# Altium PCB GeneratedSystem.PcbDoc
Units mm, origin at the board's own origin, x right, y up, seen from the top; angles counter-clockwise.
Board outline 63.14 x 52.55 mm, 2 copper layers (Top, Bottom), stack 0 mm thick; 73 components, 51 nets, 276 pads, 0 vias.
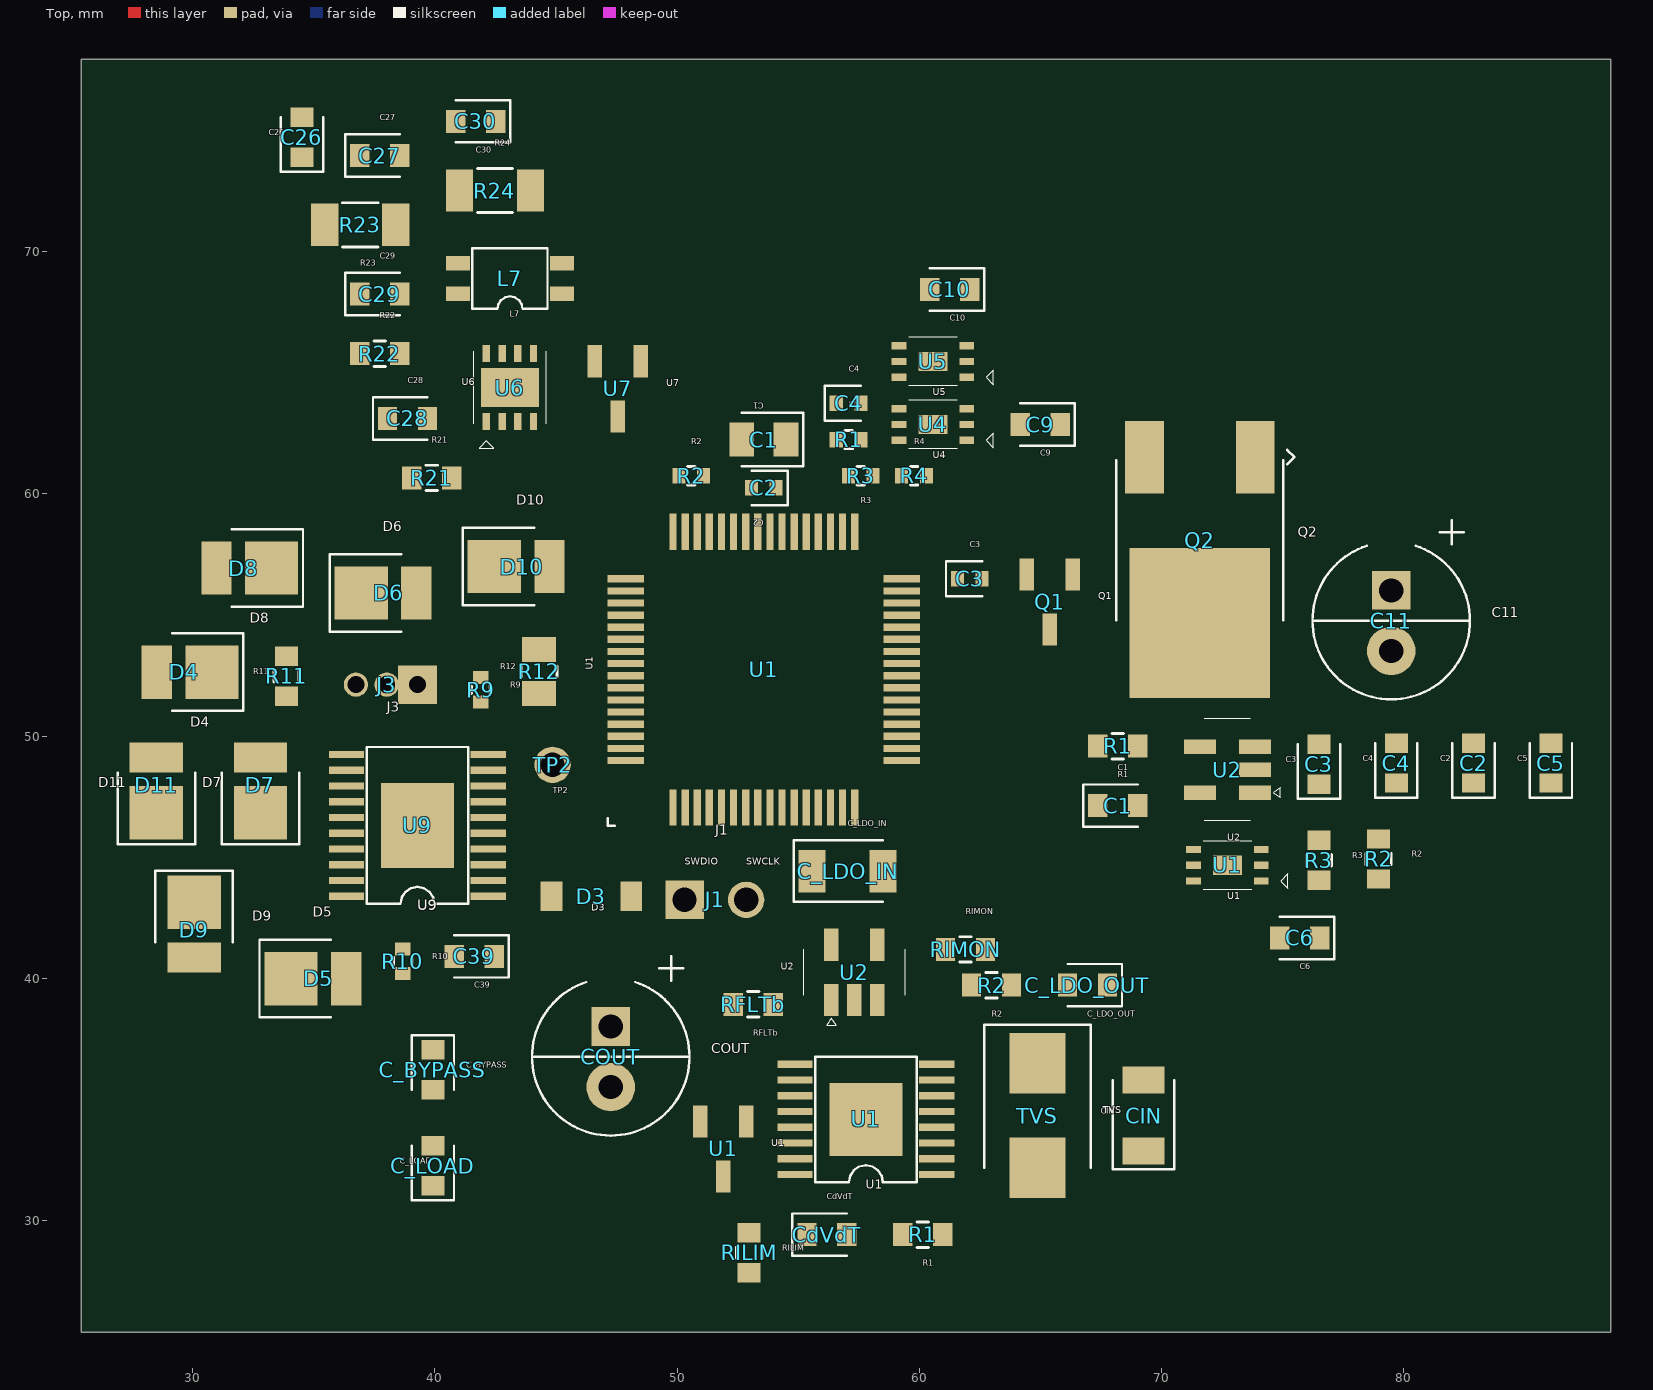
[diagram p0: Top view]
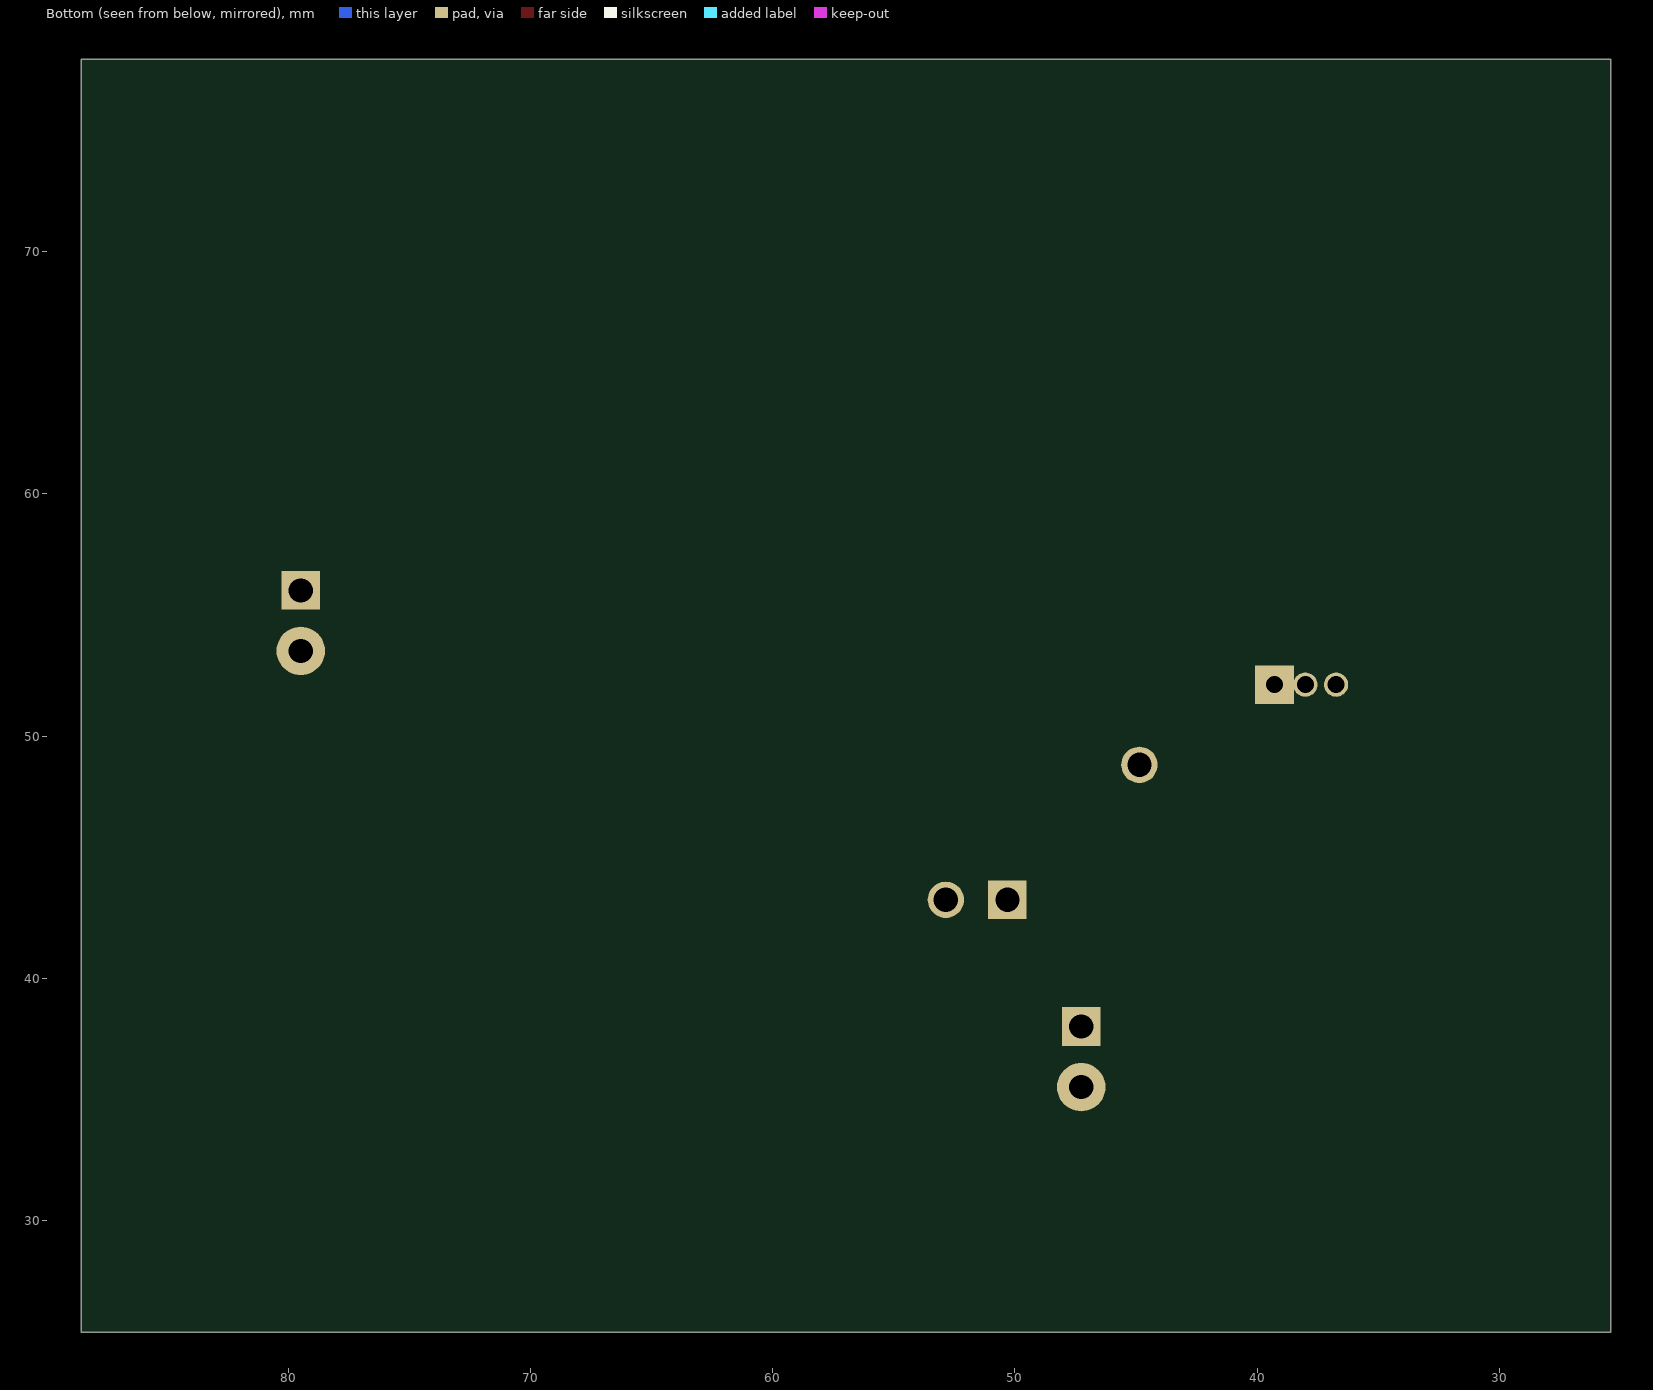
[diagram p1: Bottom view, seen from below]

## Layer stack, top to bottom

## Board outline
25.4,25.4 88.543,25.4 88.543,77.947 25.4,77.947

## Components (designator, comment, footprint, x,y, rotation, side; value= is the part's Value field where it differs from the comment)
C1 "" TSCIRCUIT-2.8500x1.4000mm 53.58,62.248 r180 top
C1 "" TSCIRCUIT-2.4500x0.9500mm 68.188,47.13 r0 top
C2 "" TSCIRCUIT-1.5600x0.6400mm 53.58,60.247 r180 top
C2 "" TSCIRCUIT-0.9500x2.4500mm 82.878,48.891 r90 top
C3 "" TSCIRCUIT-1.5600x0.6400mm 62.08,56.497 r0 top
C3 "" TSCIRCUIT-0.9500x2.4500mm 76.498,48.84 r90 top
C4 "" TSCIRCUIT-1.5600x0.6400mm 57.08,63.748 r0 top
C4 "" TSCIRCUIT-0.9500x2.4500mm 79.688,48.891 r90 top
C5 "" TSCIRCUIT-0.9500x2.4500mm 86.068,48.891 r90 top
C6 "" TSCIRCUIT-2.4500x0.9500mm 75.698,41.67 r180 top
C9 "" TSCIRCUIT-2.4500x0.9500mm 64.99,62.867 r180 top
C10 "" TSCIRCUIT-2.4500x0.9500mm 61.26,68.448 r180 top
C11 "" TSCIRCUIT-2x4.5000mm 79.481,54.771 r270 top
C26 "" TSCIRCUIT-0.9500x2.4500mm 34.51,74.722 r90 top
C27 "" TSCIRCUIT-2.4500x0.9500mm 37.72,73.972 r0 top
C28 "" TSCIRCUIT-2.4500x0.9500mm 38.87,63.123 r0 top
C29 "" TSCIRCUIT-2.4500x0.9500mm 37.72,68.253 r0 top
C30 "" TSCIRCUIT-2.4500x0.9500mm 41.68,75.387 r180 top
C39 "" TSCIRCUIT-2.4500x0.9500mm 41.63,40.912 r180 top
C_BYPASS "" TSCIRCUIT-0.9500x2.4500mm 39.915,36.233 r270 top
C_LDO_IN "" TSCIRCUIT-4.0500x1.7500mm 57.035,44.432 r0 top
C_LDO_OUT "" TSCIRCUIT-2.4500x0.9500mm 66.94,39.72 r180 top
C_LOAD "" TSCIRCUIT-0.9500x2.4500mm 39.915,32.273 r90 top
CdVdT "" TSCIRCUIT-2.4500x0.9500mm 56.185,29.422 r0 top
CIN "" TSCIRCUIT-1.7500x4.0500mm 69.255,34.34 r90 top
COUT "" TSCIRCUIT-2x4.5000mm 47.26,36.763 r270 top
D3 "" TSCIRCUIT-4.2000x1.2000mm 46.46,43.392 r180 top
D4 "" TSCIRCUIT-4x2.2000mm 29.895,52.643 r180 top
D5 "" TSCIRCUIT-4x2.2000mm 34.96,39.993 r0 top
D6 "" TSCIRCUIT-4x2.2000mm 37.855,55.912 r0 top
D7 "" TSCIRCUIT-2.2000x4mm 32.8,47.743 r90 top
D8 "" TSCIRCUIT-4x2.2000mm 32.355,56.942 r180 top
D9 "" TSCIRCUIT-2.2000x4mm 30.06,42.243 r270 top
D10 "" TSCIRCUIT-4x2.2000mm 43.355,57.002 r0 top
D11 "" TSCIRCUIT-2.2000x4mm 28.5,47.743 r90 top
J1 "" TSCIRCUIT-4.0400x1.5000mm 51.58,43.248 r0 top
J3 "" TSCIRCUIT-3.5400x1mm 38.01,52.128 r180 top
L7 "" TSCIRCUIT-5.3000x1.8700mm 43.1,68.895 r180 top
Q1 "" TSCIRCUIT-2.5000x3.6000mm#1 65.381,55.545 r270 top
Q2 "" TSCIRCUIT-6.1800x11.4500mm 71.581,57.295 r270 top
R1 "" TSCIRCUIT-1.5600x0.6400mm 57.08,62.248 r0 top
R1 "" TSCIRCUIT-2.4500x0.9500mm 68.188,49.59 r180 top
R1 "" TSCIRCUIT-2.4500x0.9500mm 60.145,29.422 r180 top
R2 "" TSCIRCUIT-1.5600x0.6400mm 50.58,60.748 r0 top
R2 "" TSCIRCUIT-0.9500x2.4500mm 78.958,44.931 r270 top
R2 "" TSCIRCUIT-2.4500x0.9500mm 62.98,39.72 r0 top
R3 "" TSCIRCUIT-1.5600x0.6400mm 57.58,60.748 r0 top
R3 "" TSCIRCUIT-0.9500x2.4500mm 76.498,44.88 r270 top
R4 "" TSCIRCUIT-1.5600x0.6400mm 59.78,60.748 r0 top
R9 "" TSCIRCUIT-0.6400x1.5600mm 41.885,51.922 r270 top
R10 "" TSCIRCUIT-0.6400x1.5600mm 38.68,40.712 r270 top
R11 "" TSCIRCUIT-0.9500x2.4500mm 33.875,52.473 r90 top
R12 "" TSCIRCUIT-1.4000x2.8500mm 44.305,52.673 r90 top
R21 "" TSCIRCUIT-2.4500x0.9500mm 39.87,60.662 r0 top
R22 "" TSCIRCUIT-2.4500x0.9500mm 37.72,65.792 r0 top
R23 "" TSCIRCUIT-4.0500x1.7500mm 36.92,71.112 r180 top
R24 "" TSCIRCUIT-4.0500x1.7500mm 42.48,72.528 r0 top
RFLTb "" TSCIRCUIT-2.4500x0.9500mm 53.14,38.933 r180 top
RILIM "" TSCIRCUIT-0.9500x2.4500mm 52.975,28.673 r270 top
RIMON "" TSCIRCUIT-2.4500x0.9500mm 61.906,41.197 r0 top
TP2 "" TSCIRCUIT-1.5000x1.5000mm 44.86,48.817 r180 top
TVS "" TSCIRCUIT-2.3000x6.8000mm 64.875,34.34 r270 top
U1 "" TSCIRCUIT-12.9000x12.8800mm 53.58,52.747 r0 top
U1 "" TSCIRCUIT-3.4000x1.6000mm#1 72.718,44.67 r180 top
U1 "" TSCIRCUIT-7.3000x4.8500mm 57.795,34.178 r180 top
U1 "" TSCIRCUIT-2.5000x3.6000mm#1 51.895,32.962 r270 top
U2 "" TSCIRCUIT-3.6000x2.5000mm 72.718,48.62 r180 top
U2 "" TSCIRCUIT-2.5000x3.6000mm#2 57.32,40.253 r90 top
U4 "" TSCIRCUIT-3.4000x1.6000mm#2 60.56,62.867 r180 top
U5 "" TSCIRCUIT-3.4000x1.6000mm#2 60.56,65.467 r180 top
U6 "" TSCIRCUIT-2.4000x3.5000mm 43.1,64.393 r90 top
U7 "" TSCIRCUIT-2.5000x3.6000mm#1 47.55,64.343 r270 top
U9 "" TSCIRCUIT-7.3000x6.1500mm 39.28,46.317 r180 top

## Footprints (in the part's own frame and the unit in brackets; to place one, negate y for a bottom-side part, rotate by r counter-clockwise, add the part's x,y. Pads: shape width x height; smd on the part's side, far side on the other; paste and mask are expansions set on the pad)
TSCIRCUIT-0.6400x1.5600mm [mm]
  rect 0.54x0.64 smd: 1(-0.51,0) 2(0.51,0)
  silkscreen extent -0.15,-0.38 0.15,0.38
TSCIRCUIT-0.9500x2.4500mm [mm]
  rect 0.8x0.95 smd: 1(-0.825,0) 2(0.825,0)
  silkscreen extent -1.43,-0.87 0.82,0.87
TSCIRCUIT-1.4000x2.8500mm [mm]
  rect 1.025x1.4 smd: 1(-0.913,0) 2(0.913,0)
  silkscreen extent -0.23,-0.73 0.23,0.73
TSCIRCUIT-1.5000x1.5000mm [mm]
  round 1.5 hole 1: 1(0,0)
TSCIRCUIT-1.5600x0.6400mm [mm]
  rect 0.54x0.64 smd: 1(-0.51,0) 2(0.51,0)
  silkscreen extent -0.98,-0.72 0.51,0.72
TSCIRCUIT-1.7500x4.0500mm [mm]
  rect 1.125x1.75 smd: 1(-1.462,0) 2(1.462,0)
  silkscreen extent -2.22,-1.28 1.46,1.27
TSCIRCUIT-2.2000x4mm [mm]
  rect 2.2x2.2 smd: 1(-0.9,0)
  rect 1.25x2.2 smd: 2(1.375,0)
  silkscreen extent -2.2,-1.6 0.75,1.6
TSCIRCUIT-2.3000x6.8000mm [mm]
  rect 2.5x2.3 smd: 1(-2.15,0) 2(2.15,0)
  silkscreen extent -3.75,-2.2 2.15,2.2
TSCIRCUIT-2.4000x3.5000mm [mm]
  rect 0.7x0.3 smd: 1(-1.4,0.975) 2(-1.4,0.325) 3(-1.4,-0.325) 4(-1.4,-0.975) 5(1.4,0.975) 6(1.4,0.325) 7(1.4,-0.325) 8(1.4,-0.975)
  rect 1.6x2.4 smd: 9(0,0)
  silkscreen extent -2.5,-1.5 1.5,1.5
TSCIRCUIT-2.4500x0.9500mm [mm]
  rect 0.8x0.95 smd: 1(-0.825,0) 2(0.825,0)
  silkscreen extent -1.43,-0.87 0.82,0.87
TSCIRCUIT-2.5000x3.6000mm#1 [mm]
  rect 1.325x0.6 smd: 1(-1.138,0.95) 2(-1.138,-0.95) 3(1.137,0)
TSCIRCUIT-2.5000x3.6000mm#2 [mm]
  rect 1.325x0.6 smd: 1(-1.138,0.95) 2(-1.138,0) 3(-1.138,-0.95) 4(1.138,-0.95) 5(1.138,0.95)
  silkscreen extent -2.19,-2.1 0.95,2.1
TSCIRCUIT-2.8500x1.4000mm [mm]
  rect 1.025x1.4 smd: 1(-0.913,0) 2(0.913,0)
  silkscreen extent -1.63,-1.1 0.91,1.1
TSCIRCUIT-2x4.5000mm [mm]
  rect 1.6x1.6 hole 1: 1(-1.25,0)
  round 2 hole 1: 2(1.25,0)
  silkscreen extent -4.15,-3.25 3.25,3.25
TSCIRCUIT-3.4000x1.6000mm#1 [mm]
  rect 0.6x0.3 smd: 1(-1.4,0.65) 2(-1.4,0) 3(-1.4,-0.65) 4(1.4,0.65) 5(1.4,0) 6(1.4,-0.65)
  rect 1.2x0.8 smd: 1(0,0)
  silkscreen extent -2.5,-1 1,1
TSCIRCUIT-3.4000x1.6000mm#2 [mm]
  rect 0.6x0.3 smd: 1(-1.4,0.65) 2(-1.4,0) 3(-1.4,-0.65) 4(1.4,0.65) 5(1.4,0) 6(1.4,-0.65)
  rect 1.2x0.8 smd: 7(0,0)
  silkscreen extent -2.5,-1 1,1
TSCIRCUIT-3.5400x1mm [mm]
  rect 1.6x1.6 hole 0.7: 1(-1.27,0)
  round 1 hole 0.7: 2(0,0) 3(1.27,0)
TSCIRCUIT-3.6000x2.5000mm [mm]
  rect 1.325x0.6 smd: 1(-1.138,0.95) 2(-1.138,0) 3(-1.138,-0.95) 4(1.138,-0.95) 5(1.138,0.95)
  silkscreen extent -2.19,-2.1 0.95,2.1
TSCIRCUIT-4.0400x1.5000mm [mm]
  rect 1.6x1.6 hole 1: 1(-1.27,0)
  round 1.5 hole 1: 2(1.27,0)
TSCIRCUIT-4.0500x1.7500mm [mm]
  rect 1.125x1.75 smd: 1(-1.462,0) 2(1.463,0)
  silkscreen extent -2.22,-1.27 1.46,1.28
TSCIRCUIT-4.2000x1.2000mm [mm]
  rect 0.9x1.2 smd: 1(-1.65,0) 2(1.65,0)
TSCIRCUIT-4x2.2000mm [mm]
  rect 2.2x2.2 smd: 1(-0.9,0)
  rect 1.25x2.2 smd: 2(1.375,0)
  silkscreen extent -2.2,-1.6 0.75,1.6
TSCIRCUIT-5.3000x1.8700mm [mm]
  rect 1x0.6 smd: 1(-2.15,0.635) 2(-2.15,-0.635) 3(2.15,-0.635) 4(2.15,0.635)
  silkscreen extent -1.55,-1.25 1.55,1.25
TSCIRCUIT-6.1800x11.4500mm [mm]
  rect 3x1.6 smd: 1(-4.225,2.29) 3(-4.225,-2.29)
  rect 6.2x5.8 smd: 2(2.625,0)
  silkscreen extent -4.52,-3.45 2.5,3.9
TSCIRCUIT-7.3000x4.8500mm [mm]
  rect 1.45x0.3 smd: 1(-2.925,2.275) 1(2.925,2.275) 2(-2.925,1.625) 3(-2.925,0.975) 4(-2.925,0.325) 5(-2.925,-0.325) 6(-2.925,-0.975) 7(-2.925,-1.625) 8(-2.925,-2.275) 9(2.925,-2.275) 10(2.925,-1.625) 11(2.925,-0.975) 12(2.925,-0.325) 13(2.925,0.325) 14(2.925,0.975) 15(2.925,1.625)
  rect 3x3 smd: 17(0,0)
  silkscreen extent -2.1,-2.59 2.1,2.59
TSCIRCUIT-7.3000x6.1500mm [mm]
  rect 1.45x0.3 smd: 1(-2.925,2.925) 2(-2.925,2.275) 3(-2.925,1.625) 4(-2.925,0.975) 5(-2.925,0.325) 6(-2.925,-0.325) 7(-2.925,-0.975) 8(-2.925,-1.625) 9(-2.925,-2.275) 10(-2.925,-2.925) 11(2.925,-2.925) 12(2.925,-2.275) 13(2.925,-1.625) 14(2.925,-0.975) 15(2.925,-0.325) 16(2.925,0.325) 17(2.925,0.975) 18(2.925,1.625) 19(2.925,2.275) 20(2.925,2.925)
  rect 3x3.5 smd: 21(0,0)
  silkscreen extent -2.1,-3.24 2.1,3.24
TSCIRCUIT-12.9000x12.8800mm [mm]
  rect 0.3x1.5 smd: 1(-3.75,-5.69) 2(-3.25,-5.69) 3(-2.75,-5.69) 4(-2.25,-5.69) 5(-1.75,-5.69) 6(-1.25,-5.69) 7(-0.75,-5.69) 8(-0.25,-5.69) 9(0.25,-5.69) 10(0.75,-5.69) 11(1.25,-5.69) 12(1.75,-5.69) 13(2.25,-5.69) 14(2.75,-5.69) 15(3.25,-5.69) 16(3.75,-5.69) 33(3.75,5.69) 34(3.25,5.69) 35(2.75,5.69) 36(2.25,5.69) 37(1.75,5.69) 38(1.25,5.69) 39(0.75,5.69) 40(0.25,5.69) 41(-0.25,5.69) 42(-0.75,5.69) 43(-1.25,5.69) 44(-1.75,5.69) 45(-2.25,5.69) 46(-2.75,5.69) 47(-3.25,5.69) 48(-3.75,5.69)
  rect 1.5x0.3 smd: 17(5.7,-3.75) 18(5.7,-3.25) 19(5.7,-2.75) 20(5.7,-2.25) 21(5.7,-1.75) 22(5.7,-1.25) 23(5.7,-0.75) 24(5.7,-0.25) 25(5.7,0.25) 26(5.7,0.75) 27(5.7,1.25) 28(5.7,1.75) 29(5.7,2.25) 30(5.7,2.75) 31(5.7,3.25) 32(5.7,3.75) 49(-5.7,3.75) 50(-5.7,3.25) 51(-5.7,2.75) 52(-5.7,2.25) 53(-5.7,1.75) 54(-5.7,1.25) 55(-5.7,0.75) 56(-5.7,0.25) 57(-5.7,-0.25) 58(-5.7,-0.75) 59(-5.7,-1.25) 60(-5.7,-1.75) 61(-5.7,-2.25) 62(-5.7,-2.75) 63(-5.7,-3.25) 64(-5.7,-3.75)
  silkscreen extent -6.45,-6.44 -6.15,-6.14

## Nets (pads, with @x,y where several pads share a name; then routed paths per layer and width w, separated by ;. In a path a pad name is that pad's centre, name@x,y a point inside that pad or via, vN(x,y) a via of type N, cw(c..) or ccw(c..) an arc to the next point about the centre after c; other vN are vias at no path point)
".C3 > .pin1 to U1.VCORE": C3.1@61.57,56.497 U1.32
".CdVdT > .pin1 to U1.DVDT": CdVdT.1 U1.12@54.87,34.502
".D3 > .cathode to U9.SUPPLY": C39.1 D3.2 U9.1
".R1 > .pin2 to U1.OVP": R1.2@59.32,29.422 R2.1@62.155,39.72 U1.5@60.72,34.502
".R3 > .pin1 to U2.inverting_input": C1.2@69.013,47.13 R1.1@69.013,49.59 R3.1@76.498,45.705 U2.2@73.856,48.62
".R3 > .pin2 to C6.pin1": C6.1 R3.2@76.498,44.055
".R21 > .pin2 to U6.VCC": C28.1 R21.2 U6.3
".R22 > .pin2 to U6.VIO": C29.1 R22.2 U6.5
".R23 > .pin2 to R24.pin1": C27.2 R23.2 R24.1
".RILIM > .pin1 to U1.ILIM": RILIM.1 U1.11@54.87,35.153
".U1 > .ROSC to R2.pin1": R2.1@50.07,60.748 U1.42
".U2 > .output to Q2.base": Q2.2 U2.4@71.581,49.57
".U6 > .CANH to L7.pin4": L7.4 U6.7
".U6 > .CANL to L7.pin1": L7.1 U6.6
".U9 > .IOUT1 to D5.anode": D5.1 U9.20
".U9 > .IOUT2 to D7.anode": D7.1 U9.19
".U9 > .IOUT3 to D9.anode": D9.1 U9.18
".U9 > .IOUT4 to D11.anode": D11.1 U9.17
".U9 > .IOUT5 to D4.anode": D4.1 U9.16
".U9 > .IOUT6 to D6.anode": D6.1 U9.15
".U9 > .IOUT7 to D8.anode": D8.1 U9.14
".U9 > .IOUT8 to D10.anode": D10.1 U9.13
".U9 > .REF to R11.pin1": R11.1 U9.11
".U9 > .STOP to R10.pin1": R10.1 U9.3
".U9 > .TEMP to R12.pin1": R12.1 U9.9
CAN_RXD: U1.6@52.33,47.058 U6.4
CAN_STB: U1.49 U6.8
CAN_TXD: U1.5@51.83,47.058 U6.1
CANH: C26.1 L7.3 R23.1 U7.2
CANL: C30.1 L7.2 R24.2 U7.1
DACOUT: C6.2 U1.6@71.318,45.32 U2.1@73.856,47.67
DISC: Q1.2 R2.2@78.958,44.106 U1.56
EC_PLUS: C1.1@67.363,47.13 Q1.1 Q2.3 R1.2@67.363,49.59
GND: C1.2@52.667,62.248 C2.2 C3.2 C4.2 C5.2 C9.2 C10.2 C11.2 C26.2 C27.1 C28.2 C29.2 C30.2 C39.2 C_BYPASS.2 C_LDO_IN.2 C_LDO_OUT.2 C_LOAD.2 CdVdT.2 CIN.2 COUT.2 D4.2 D5.2 D6.2 D7.2 D8.2 D9.2 D10.2 D11.2 J3.1 Q1.3 R2.2@51.09,60.748 R2.2@63.805,39.72 R10.2 R11.2 R12.2 RILIM.2 RIMON.2 TVS.1 U1.3@51.895,31.825 U1.4@71.318,44.02 U1.6@60.72,35.153 U1.8@60.72,36.453 U1.9@54.87,36.453 U1.41 U2.2@57.32,39.115 U2.3@73.856,49.57 U4.2 U4.3 U4.7 U5.3 U5.7 U6.2 U6.9 U7.3 U9.12 U9.21
HEALTH_MONITOR: RFLTb.2 U1.8@53.33,47.058 U1.14@54.87,33.202
LED_EN: J3.2 U1.57 U9.2
LED_SW: R9.2 TP2.1 U1.9@53.83,47.058 U9.4 U9.5 U9.6 U9.7
LOAD_MONITOR: RIMON.1 U1.7@52.83,47.058 U1.10@54.87,35.802
NRST: C4.1@56.57,63.748 R1.1@56.57,62.248 U1.38
ON_OFF_CONTROL: U1.7@60.72,35.802 U2.3@58.27,39.115
OPT_B: U1.54 U4.5
OPT_F: U1.55 U5.5
SCL: R3.1@57.07,60.748 U1.2@74.118,44.67 U1.34 U4.4 U5.4
SDA: R4.1 U1.3@74.118,45.32 U1.33 U4.6 U5.6
SWCLK: J1.2 U1.13@55.83,47.058
SWDIO: J1.1 U1.12@55.33,47.058
TEMP_SENSE: C_LOAD.1 U1.2@50.945,34.1 U1.31
V3P3: C1.1@54.492,62.248 C2.1 C3.1@76.498,48.015 C4.1@79.688,48.066 C5.1 C9.1 C10.1 C_BYPASS.1 C_LDO_OUT.1 J3.3 R1.2@57.59,62.248 R2.1@78.958,45.756 R3.2@58.09,60.748 R4.2 R9.1 R22.1 U1.1@52.845,34.1 U1.1@74.118,44.02 U1.5@71.318,44.67 U1.40 U2.5 U4.1 U5.1 U5.2
V5P0: R21.1
VBATT_12V: C11.1 C_LDO_IN.1 COUT.1 D3.1 Q2.1 RFLTb.1 U1.15@54.87,32.553 U2.1@56.37,39.115
VIN: CIN.1 R1.1@60.97,29.422 TVS.2 U1.2@60.72,32.553 U1.3@60.72,33.202
pads on no net: U1.1@49.83,47.058 U1.1@54.87,31.902 U1.1@60.72,31.902 U1.1@72.718,44.67 U1.2@50.33,47.058 U1.3@50.83,47.058 U1.4@51.33,47.058 U1.4@60.72,33.853 U1.10@54.33,47.058 U1.11@54.83,47.058 U1.13@54.87,33.853 U1.14@56.33,47.058 U1.15@56.83,47.058 U1.16 U1.17 U1.18 U1.19 U1.20 U1.21 U1.22 U1.23 U1.24 U1.25 U1.26 U1.27 U1.28 U1.29 U1.30 U1.35 U1.36 U1.37 U1.39 U1.43 U1.44 U1.45 U1.46 U1.47 U1.48 U1.50 U1.51 U1.52 U1.53 U1.58 U1.59 U1.60 U1.61 U1.62 U1.63 U1.64 U2.4@58.27,41.39 U9.8 U9.10

## Text inside footprints (layer, text, board x,y; h text height)
D3: Mech1 "+" at 48.035,43.392 h0.3; Mech1 "-" at 44.885,43.392 h0.3
D4: Mech1 "+" at 31.395,52.643 h0.55; Mech1 "-" at 28.395,52.643 h0.55
D5: Mech1 "+" at 33.46,39.993 h0.55; Mech1 "-" at 36.46,39.993 h0.55
D6: Mech1 "+" at 36.355,55.912 h0.55; Mech1 "-" at 39.355,55.912 h0.55
D7: Mech1 "+" at 32.8,46.243 h0.55; Mech1 "-" at 32.8,49.242 h0.55
D8: Mech1 "+" at 33.855,56.942 h0.55; Mech1 "-" at 30.855,56.942 h0.55
D9: Mech1 "+" at 30.06,43.743 h0.55; Mech1 "-" at 30.06,40.742 h0.55
D10: Mech1 "+" at 41.855,57.002 h0.55; Mech1 "-" at 44.855,57.002 h0.55
D11: Mech1 "+" at 28.5,46.243 h0.55; Mech1 "-" at 28.5,49.242 h0.55
J1: Top Overlay "SWDIO" at 50.31,44.598 h0.5; Top Overlay "SWCLK" at 52.85,44.598 h0.5
TVS: Mech1 "+" at 64.875,36.89 h0.58; Mech1 "-" at 64.875,31.79 h0.58